# Altium PCB captivate_bswp.PcbDoc
Units mil, origin at the board's own origin, x right, y up, seen from the top; angles counter-clockwise.
Board outline 6000 x 3500 mil, 2 copper layers (Top Layer, Bottom Layer), stack 62 mil thick; 11 components, 28 nets, 57 pads, 27 vias.
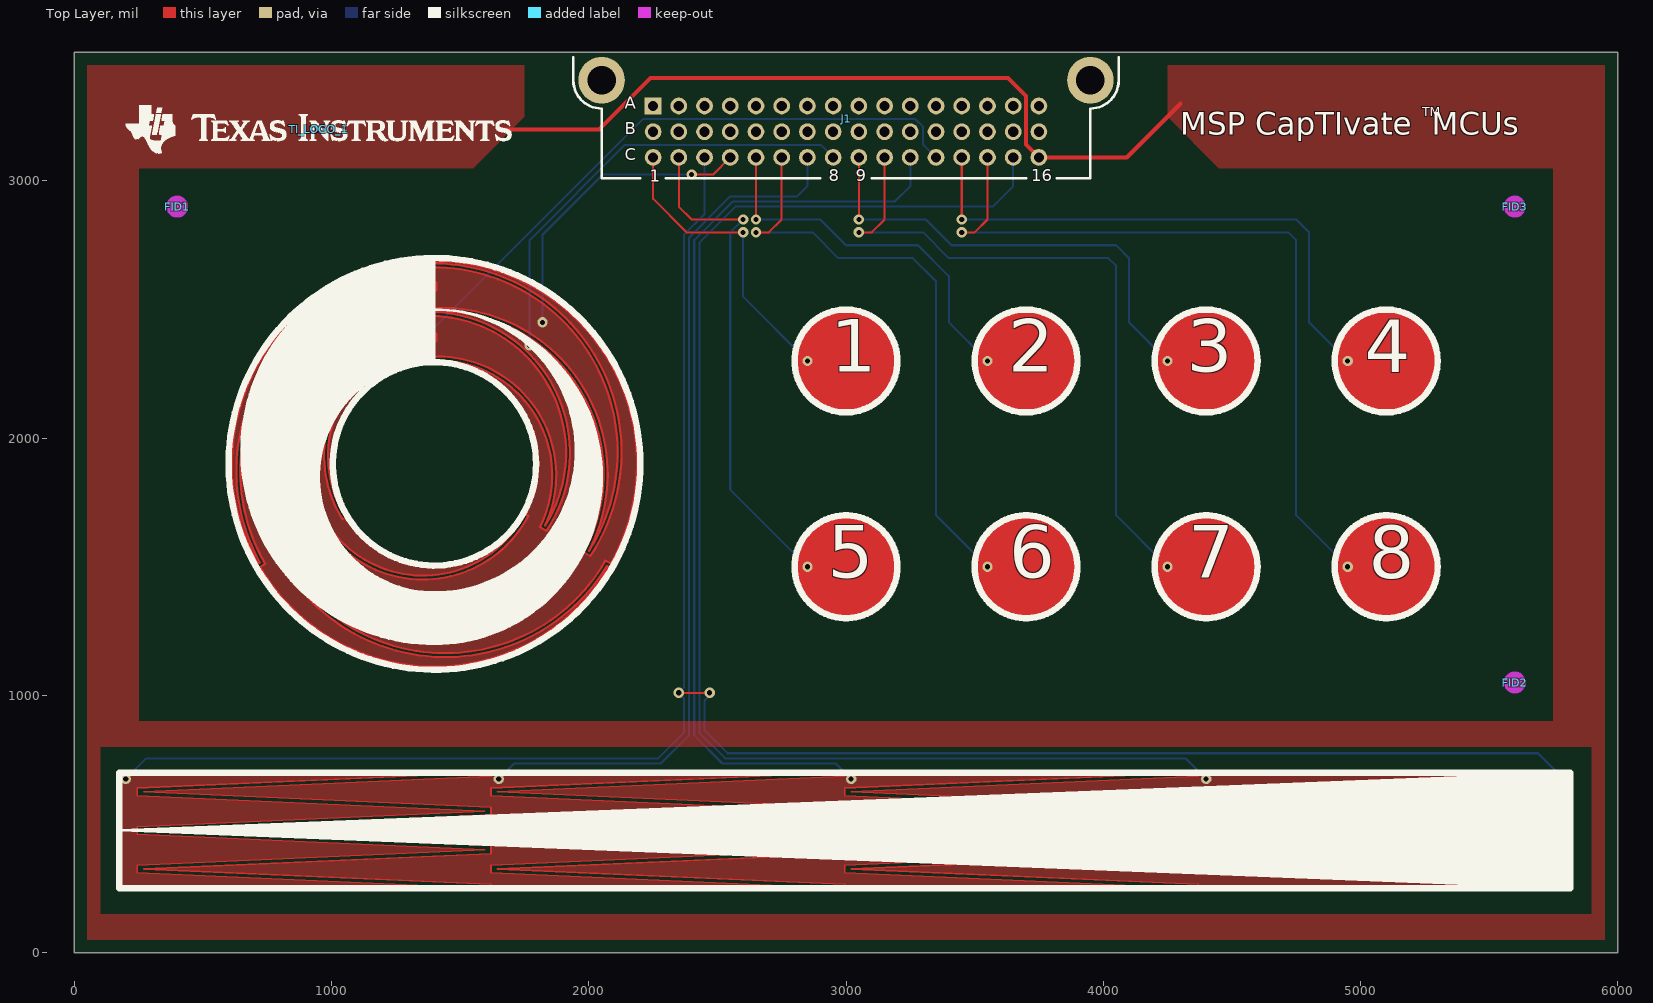
[diagram p0: Top Layer view]
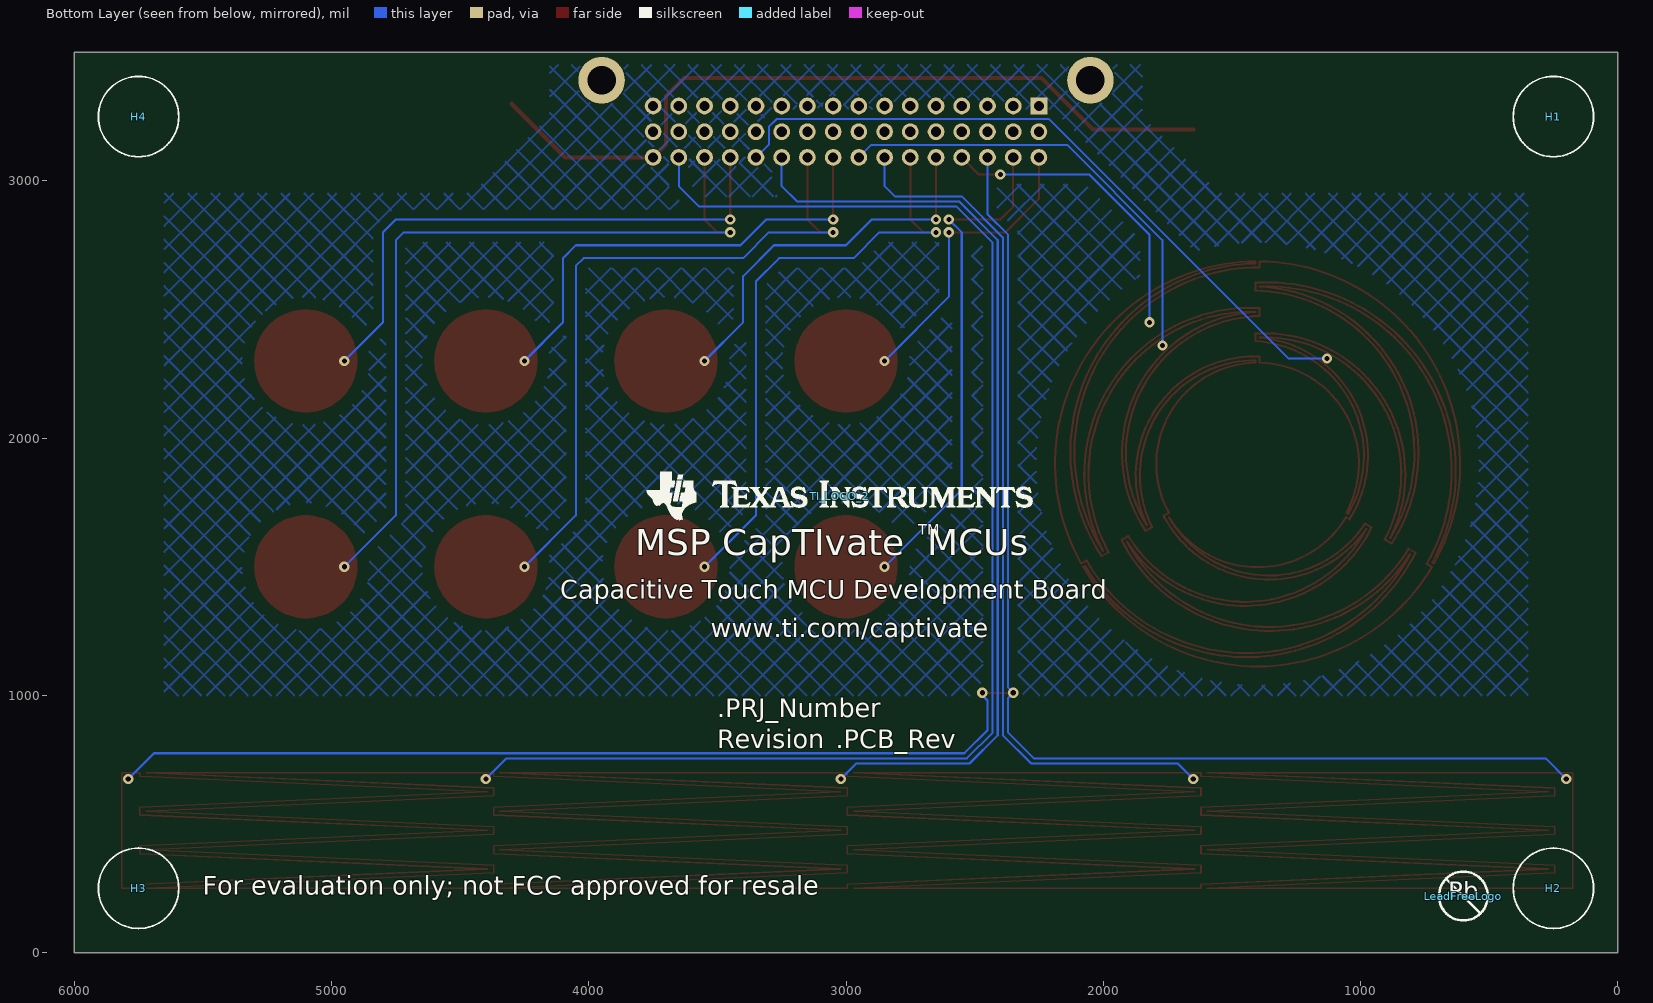
[diagram p1: Bottom Layer view, seen from below]

## Layer stack, top to bottom
Top Solder: solder mask 0.4, Solder Resist, Dk 3.5
Top Layer: signal copper 1.4
Dielectric1: core 59.2, FR-4, Dk 4.8
Bottom Layer: signal copper 1.4
Bottom Solder: solder mask 0.4, Solder Resist, Dk 3.5

## Board outline
0,0 0,3500 6000,3500 6000,0

## Design rules (kind name [scope] priority, off if disabled: settings)
AcuteAngle [All] p1: minimum=4.50000000000000E+0001 checktracksonly=FALSE
AssemblyTestPointUsage [All] p1: valid=2
Clearance Clearance_Poly_Bottom_To_Track [OnBottom And InPolygon vs IsTrack] p1: gap=32
Clearance Clearance_Poly_Connectors [(InNamedPolygon('Top Layer Pour')) OR (InNamedPolygon('Bottom Layer Pour')) vs (InComponent('J1')) OR (Incomponent('J2'))] p2: gap=40
Clearance Clearance_Poly_Components [(InNamedPolygon('Top Layer Pour')) OR (InNamedPolygon('Bottom Layer Pour'))] p3: gap=20
Clearance Clearance_General [All] p4: gap=6
Clearance Clearance_BoardEdge_MountingHoles [OnCopper and InComponentClass('Mounting Holes') vs IsKeepOut] p5: gap=40
Clearance Clearance_BoardEdge_Poly [OnCopper and InPoly vs IsKeepOut] p6: gap=7.87
Clearance Clearance_BoardEdge [OnCopper and Not InComponentClass('Logo') and not InComponentClass('FiducialMark') and not InRegion(1000,500,4000,800) and Not IsKeepout vs IsKeepOut] p7: gap=7.87
ComponentClearance ComponentClearance_Logo [InComponentClass('Logo')] p1: gap=7.87 collisioncheckmode=3 verticalgap=7.87 showdistances=TRUE
ComponentClearance ComponentClearance_ScrewToNut [(HasFootprint('NY PMS 440 0025 PH')) vs (HasFootprint('Keystone_1902C'))] p2: gap=5 collisioncheckmode=3 verticalgap=10 showdistances=FALSE
ComponentClearance ComponentClearance_MountingHoles [InComponentClass('Mounting Holes')] p3: gap=250 collisioncheckmode=3 verticalgap=100000 showdistances=FALSE
ComponentClearance ComponentClearance_SmallPassives [HasFootprint('0201*') or HasFootprint('0402*') or HasFootprint('0508') or HasFootprint('0603*') or HasFootprint('0612') or HasFootprint('0805*') or HasFootprint('0815*') or HasFootprint('0830*') or HasFootprint('1206*') or HasFootprint('1210*') or HasFootprint('1808*') or HasFootprint('1812*') or HasFootprint('1825*') or HasFootprint('2010*') or HasFootprint('2220*') or HasFootprint('2225*') or HasFootprint('2512*') or HasFootprint('2728*') or HasFootprint('3518*') vs HasFootprint('0201*') or HasFootprint('0402*') or HasFootprint('0508') or HasFootprint('0603*') or HasFootprint('0612') or HasFootprint('0805*') or HasFootprint('0815*') or HasFootprint('0830*') or HasFootprint('1206*') or HasFootprint('1210*') or HasFootprint('1808*') or HasFootprint('1812*') or HasFootprint('1825*') or HasFootprint('2010*') or HasFootprint('2220*') or HasFootprint('2225*') or HasFootprint('2512*') or HasFootprint('2728*') or HasFootprint('3518*')] p4: gap=20 collisioncheckmode=3 verticalgap=10 showdistances=FALSE
ComponentClearance ComponentClearance_THtoSMT [IsThruComponent vs IsSMTComponent] p5: gap=10 collisioncheckmode=3 verticalgap=100000 showdistances=TRUE
ComponentClearance ComponentClearance_THtoTH [IsThruComponent vs IsThruComponent] p6: gap=50 collisioncheckmode=3 verticalgap=100000 showdistances=FALSE
ComponentClearance [All] p7: gap=40 collisioncheckmode=3 verticalgap=10 showdistances=FALSE
DiffPairsRouting [All] p1: maxlimit=100 minlimit=10 mostfreqgap=10 toplayer_minwidth=15 toplayer_maxwidth=15 toplayer_prefwidth=15 bottomlayer_minwidth=15 bottomlayer_maxwidth=15 bottomlayer_prefwidth=15 maxuncoupledlength=1000
FabricationTestPointUsage TestPointUsage [All] p1: valid=2 allowmultiple=FALSE
FabricationTestpoint Testpoint [All] p1: side=3 testpointundercomponent=TRUE minsize=40 maxsize=100 preferedsize=60 minholesize=0 maxholesize=40 preferedholesize=32 testpointgrid=1 allowsidetop=TRUE allowsidebottom=TRUE usegrid=TRUE gridtolerance=0.01
FanoutControl Fanout_LCC [IsLCC] p1: bgadir=Out bgaviamode=Centered fanoutstyle=Auto fanoutdirection=Alternating viagrid=1 // Fanout_LCC (Default Rule)
FanoutControl Fanout_BGA [IsBGA] p2: bgadir=Out bgaviamode=Centered fanoutstyle=Auto fanoutdirection=Alternating viagrid=1 // Fanout_BGA (Default Rule)
FanoutControl Fanout_Default [All] p4: bgadir=Out bgaviamode=Centered fanoutstyle=Auto fanoutdirection=Alternating viagrid=1 // Fanout_Default (Default Rule)
FanoutControl Fanout_Small [(CompPinCount < 5)] p5: bgadir=Out bgaviamode=Centered fanoutstyle=Auto fanoutdirection=OutThenIn viagrid=1 // Fanout_Small (Default Rule)
HoleSize [All] p1: absolutevalues=TRUE maxlimit=251 minlimit=8 maxpercent=80.000 minpercent=20.000
MinimumAnnularRing [All] p1: minimumring=9
MinimumSolderMaskSliver MinimumSolderMaskSliver_Logo [InComponentClass('Logo') vs InComponentClass('Logo')] p1: minsoldermaskwidth=0.7
MinimumSolderMaskSliver [All] p2: minsoldermaskwidth=4
PlaneConnect [All] p1: planeconnectstyle=Relief reliefexpansion=10 reliefentries=4 reliefconductorwidth=10 reliefairgap=10
PolygonConnect [All] p1: connectstyle=Direct reliefconductorwidth=10 reliefentries=4 polygonreliefangle="45 Angle" airgapwidth=10
RoutingVias [All] p1: holewidth=16 width=34 viastyle="Through Hole" minholewidth=8 minwidth=26 maxholewidth=40 maxwidth=65
SilkToSilkClearance [All] p1: silktosilkclearance=5
SilkToSolderMaskClearance SilkscreenOverComponentPads [IsPad] p1: minsilkscreentomaskgap=5 clearancetoexposedcopper=TRUE
SolderMaskExpansion [All] p1: expansion=3
UnpouredPolygon [All] p1: allowunpoured=FALSE
Width [All] p1: maxlimit=100 minlimit=6 preferedwidth=10 checkconnectedcopper=TRUE
15 further rules are at their usual default settings.

## Classes and differential pairs
component class Logo: TI_LOGO_1 TI_LOGO_2
component class FiducialMark: FID1 FID2 FID3

## Components (designator, comment, footprint, x,y, rotation, side; value= is the part's Value field where it differs from the comment)
FID1 "Fiducial" Fiducial10-20 400,2900 r0 top
FID2 "Fiducial" Fiducial10-20 5600,1050 r0 top
FID3 "Fiducial" Fiducial10-20 5600,2900 r0 top
H1 "SJ61A1" Bumpon_SJ61A1 250,3250 r90 bottom
H2 "SJ61A1" Bumpon_SJ61A1 250,250 r90 bottom
H3 "SJ61A1" Bumpon_SJ61A1 5750,250 r90 bottom
H4 "SJ61A1" Bumpon_SJ61A1 5750,3250 r90 bottom
J1 "CAPTIVATE-CONN-PANEL" CAPTIVATE-CONN-48 3000,3500 r0 top
LeadFreeLogo "Pb-Free Symbol" Pb-Free_Overlay_Medium 600,220 r180 bottom
TI_LOGO_1 "Texas Instruments" TI_Horizontal_Overlay_Medium 950,3200 r0 top
TI_LOGO_2 "Texas Instruments" TI_Horizontal_Overlay_Medium 3025,1775 r180 bottom

## Footprints (in the part's own frame and the unit in brackets; to place one, negate y for a bottom-side part, rotate by r counter-clockwise, add the part's x,y. Pads: shape width x height; smd on the part's side, far side on the other; paste and mask are expansions set on the pad)
Bumpon_SJ61A1 [mil] "3M Cylindrical Bumpon black"
  round 1 on Mech4: 0(0,0)
  silkscreen extent -156,-156 156,156, body extent -156,-155 156,156, height 201
CAPTIVATE-CONN-48 [mm] "Connector, 3x16, 100mil, TH, RA"
  rect 1.65x1.65 hole 1: A1(-19.05,-5.3)
  round 1.65 hole 1: A2(-16.51,-5.3) A3(-13.97,-5.3) A4(-11.43,-5.3) A5(-8.89,-5.3) A6(-6.35,-5.3) A7(-3.81,-5.3) A8(-1.27,-5.3) A9(1.27,-5.3) A10(3.81,-5.3) A11(6.35,-5.3) A12(8.89,-5.3) A13(11.43,-5.3) A14(13.97,-5.3) A15(16.51,-5.3) A16(19.05,-5.3) B1(-19.05,-7.84) B2(-16.51,-7.84) B3(-13.97,-7.84) B4(-11.43,-7.84) B5(-8.89,-7.84) B6(-6.35,-7.84) B7(-3.81,-7.84) B8(-1.27,-7.84) B9(1.27,-7.84) B10(3.81,-7.84) B11(6.35,-7.84) B12(8.89,-7.84) B13(11.43,-7.84) B14(13.97,-7.84) B15(16.51,-7.84) B16(19.05,-7.84) C1(-19.05,-10.38) C2(-16.51,-10.38) C3(-13.97,-10.38) C4(-11.43,-10.38) C5(-8.89,-10.38) C6(-6.35,-10.38) C7(-3.81,-10.38) C8(-1.27,-10.38) C9(1.27,-10.38) C10(3.81,-10.38) C11(6.35,-10.38) C12(8.89,-10.38) C13(11.43,-10.38) C14(13.97,-10.38) C15(16.51,-10.38) C16(19.05,-10.38)
  round 4.6 hole 2.8: H1(-24.13,-2.76) H2(24.13,-2.76)
  silkscreen extent -26.92,-12.45 26.92,-0.51
Fiducial10-20 [mm]
  round 1 smd mask+0.5: 1(0,0)
  Top Layer keep-out circle w1.178: c0,0 r0.5
Pb-Free_Overlay_Medium [mil]
  silkscreen extent -95,-95 95,95
TI_Horizontal_Overlay_Medium [mil]
  silkscreen extent -750,-94 750,94

## Part data
FID1 FID2 FID3: "Fiducial mark.  There is nothing to buy or mount."
H1 H2 H3 H4: "Bumpon, Cylindrical, 0.312 X 0.200, Black"
J1: library part CAPTIVATE-CONN-MSP-EXP430FR2633-PANEL, "CapTIvate Panel-Side Connector, 3x16, 100mil, TH, RA, M, MSP-EXP430FR2633"
LeadFreeLogo: library part Pb-Free
TI_LOGO_1 TI_LOGO_2: library part TI_Logo, "Texas Instrument Corporate Signature"

## Via types
v1: diameter 40, hole 20, Top Layer to Bottom Layer, tented both sides, 27 vias

## Nets (pads, with @x,y where several pads share a name; then routed paths per layer and width w, separated by ;. In a path a pad name is that pad's centre, name@x,y a point inside that pad or via, vN(x,y) a via of type N, cw(c..) or ccw(c..) an arc to the next point about the centre after c; other vN are vias at no path point)
CAP0.0: J1.C1 | length 1168.7
  Top Layer w8: J1.C1 2250,2930 2380,2800 v1(2600,2800)
  Bottom Layer w8: v1(2600,2800) 2600,2550 v1(2850,2300)
CAP0.1: J1.C2 | length 1957
  Top Layer w8: J1.C2 2350,2900 2400,2850 v1(2600,2850)
  Bottom Layer w8: v1(2600,2850) 2550,2800 2550,1800 v1(2850,1500)
CAP0.2: J1.C3 | length 28498.6
  Top Layer w6: 175,250 175,700 1595,700 245,640 245,610 1595,550 245,490 245,460 1595,400 245,340 245,310 1595,250 175,250 ; 4395,325 5745,265 5745,250 5815,250 5815,700 5745,700 5745,685 4395,625 5745,565 5745,535 4395,475 5745,415 5745,385 4395,325
  Top Layer w8: v1(2350,1010) v1(2470,1010)
  Bottom Layer w8: v1(200,675) 280,755 2270,755 2370,855 2370,990 v1(2350,1010) 2370,1030 2370,2790 2450,2870 J1.C3 ; v1(2470,1010) 2470,1000 2450,980 2450,865 2540,775 5690,775 v1(5790,675)
CAP0.3: J1.C4 | length 13714
  Top Layer w7.87: 714.19,1513.14 cw(c1400,1900) 1392.13,2687.36 1392.13,2663.8 cw(c1393.9,1945.75) 2000.85,1562.06 ccw(c1427.26,1860.36) 1392.13,2505.93 1392.13,2475.05 cw(c1379.26,1942.96) 1830.13,1660.13 ccw(c1412.1,1855.9) 1392.13,2317.07 1392.13,2293.62 ccw(c1400,1900) 1055,1710.33 1048.11,1706.09 cw(c1432.66,1931.7) 1407.87,2376.87 1407.87,2406.59 ccw(c1373.66,1859.64) 884.93,1611.72 884.43,1611.34 cw(c1421.09,1942.8) 1407.87,2573.44 1407.87,2604.3 ccw(c1363.43,1871.84) 721.06,1517.11 714.19,1513.14
  Top Layer w8: v1(2400,3025) 2483.66,3025 J1.C4
  Bottom Layer w8: v1(1820,2450) 1820,2790 2055,3025 v1(2400,3025)
CAP1.0: J1.C5 | length 1474.6
  Top Layer w8: v1(2650,2850) J1.C5
  Bottom Layer w8: v1(2650,2850) 2900,2850 3000,2750 3280,2750 3400,2630 3400,2450 v1(3550,2300)
CAP1.1: J1.C6 | length 2333.6
  Top Layer w8: v1(2650,2800) 2700,2800 2750,2850 J1.C6
  Bottom Layer w8: v1(2650,2800) 2870,2800 2970,2700 3260,2700 3350,2610 3350,1700 v1(3550,1500)
CAP1.2: J1.C7 | length 22495.6
  Top Layer w6: 270,325 1620,265 1620,250 2970,250 1620,310 1620,340 2970,400 1620,460 1620,490 2970,550 1620,610 1620,640 2970,700 1620,700 1620,685 270,625 1620,565 1620,535 270,475 1620,415 1620,385 270,325
  Bottom Layer w8: v1(1650,675) 1710,735 2280,735 2390,845 2390,2780 2550,2940 2810,2940 2850,2980 J1.C7
CAP1.3: J1.C8 | length 14285.9
  Top Layer w5.91: 1979.28,1556.46 2006,1541.03
  Top Layer w7.87: 1979.28,1556.46 ccw(c1426.52,1860.33) 1407.87,2490.83 1407.87,2490.2 cw(c1379.26,1942.96) 1835.52,1639.46 1809.81,1654.46 ccw(c1412.1,1855.9) 1407.87,2301.7 1407.87,2293.62 cw(c1400,1900) 1744.67,1709.73 1765.13,1698.28 cw(c1355.76,1911.57) 977.2,1647.43 ccw(c1447.9,1895.84) 1902.45,1619 1928.69,1603.85 cw(c1352.38,1896.87) 807.53,1548.84 806.96,1548.52 ccw(c1442.67,1882.41) 2065.41,1524.92 2085.81,1513.14 ccw(c1400,1900) 1407.87,2687.36 1407.87,2679.42 cw(c1393.9,1945.75) 2006,1541.03
  Bottom Layer w8: v1(1770,2360) 1770,2770 2140,3140 2901.34,3140 J1.C8
CAP2.0: J1.C9 | length 1815.6
  Top Layer w8: v1(3050,2850) J1.C9
  Bottom Layer w8: v1(3050,2850) 3310,2850 3410,2750 4050,2750 4100,2700 4100,2450 v1(4250,2300)
CAP2.1: J1.C10 | length 2668.7
  Top Layer w8: v1(3050,2800) 3100,2800 3150,2850 J1.C10
  Bottom Layer w8: v1(3050,2800) 3300,2800 3400,2700 4020,2700 4050,2670 4050,1700 v1(4250,1500)
CAP2.2: J1.C11 | length 22739.7
  Top Layer w6: 1645,325 2995,385 2995,415 1645,475 2995,535 2995,565 1645,625 2995,685 2995,700 4345,700 2995,640 2995,610 4345,550 2995,490 2995,460 4345,400 2995,340 2995,310 4345,250 2995,250 2995,265 1645,325
  Bottom Layer w8: v1(3020,675) 2960,735 2520,735 2410,845 2410,2770 2560,2920 3190,2920 3250,2980 J1.C11
CAP2.3: J1.C12 | length 15226.2
  Top Layer w7.87: 1392.12,2588.68 ccw(c1421.1,1942.8) 879.18,1590.21 905.93,1605.66 cw(c1373.66,1859.64) 1392.43,2391.55 ccw(c1432.66,1931.7) 1042.75,1684.65 1055.97,1692.47 ccw(c1400,1900) 1743.88,1692.21 cw(c1355.76,1911.57) 982.43,1667.89 956.74,1652.83 ccw(c1447.9,1895.84) 1907.77,1597.83 cw(c1352.38,1896.86) 812.85,1570.1 786.12,1554.67 ccw(c1442.67,1882.41) 2071.06,1503.47 2077.94,1499.5 cw(c1400,1900) 722.06,1499.5 742.46,1511.28 cw(c1363.43,1871.84) 1392.13,2589.32 1392.13,2588.68
  Bottom Layer w8: v1(1130,2310) 1280,2310 2210,3240 3270,3240 3300,3210 3300,3141.34 J1.C12
CAP3.0: J1.C13 | length 2174.2
  Top Layer w8: v1(3450,2850) J1.C13
  Bottom Layer w8: v1(3450,2850) 4750,2850 4800,2800 4800,2450 v1(4950,2300)
CAP3.1: J1.C14 | length 3027.3
  Top Layer w8: v1(3450,2800) 3500,2800 3550,2850 J1.C14
  Bottom Layer w8: v1(3450,2800) 4720,2800 4750,2770 4750,1700 v1(4950,1500)
CAP3.2: J1.C15 | length 24468
  Top Layer w6: 3020,325 4370,385 4370,415 3020,475 4370,535 4370,565 3020,625 4370,685 4370,700 5720,700 4370,640 4370,610 5720,550 4370,490 4370,460 5720,400 4370,340 4370,310 5720,250 4370,250 4370,265 3020,325
  Bottom Layer w8: J1.C15 3650,2980 3570,2900 2570,2900 2430,2760 2430,855 2530,755 4320,755 v1(4400,675)
CAP3.3: J1.C16 | length 3057.6
  Top Layer w16: 1650,3200 2040,3200 2240,3400 3630,3400 3700,3330 3700,3141.34 J1.C16 4091.34,3091.34 4300,3300
GND: J1.A1 J1.A16
NetJ1_A2: J1.A2
NetJ1_A3: J1.A3
NetJ1_A4: J1.A4
NetJ1_A5: J1.A5
NetJ1_A11: J1.A11
NetJ1_A12: J1.A12
NetJ1_A13: J1.A13
NetJ1_A14: J1.A14
NetJ1_A15: J1.A15
NetJ1_H1: J1.H1
NetJ1_H2: J1.H2
pads on no net: FID1.1 FID2.1 FID3.1 H1.0 H2.0 H3.0 H4.0 J1.A6 J1.A7 J1.A8 J1.A9 J1.A10 J1.B1 J1.B2 J1.B3 J1.B4 J1.B5 J1.B6 J1.B7 J1.B8 J1.B9 J1.B10 J1.B11 J1.B12 J1.B13 J1.B14 J1.B15 J1.B16

## Polygon pours and split planes (outlines as drawn)
CAP3.3 on Top Layer "Top Layer-No Net 4" (solid, remove dead copper, pour order 21): 50,800 5950,800 5950,950 5750,950 5750,900 250,900 250,950 50,950 50,800
CAP3.3 on Top Layer "Top Layer-No Net 3" (solid, remove dead copper, pour order 16): 1750,3450 50,3450 50,50 5950,50 5950,3450 4250,3450 4250,3250 4450,3050 5750,3050 5750,950 5900,800 5900,300 5900,150 5250,150 100,150 100,800 250,950 250,1850 250,3050 800,3050 1550,3050 1750,3250 1750,3450
CAP1.3 on Top Layer "Top" (solid, remove dead copper, pour order 14): 803.47,1546.68 cw(c806.96,1548.52) 804.99,1551.94 805.55,1552.26 cw(c807.53,1548.84) 810.86,1550.97 ccw(c1352.38,1896.87) 1923.46,1602.31 1903.81,1613.65 cw(c1447.9,1895.84) 973.71,1645.59 cw(c977.2,1647.43) 977.2,1651.38 cw(c977.2,1647.43) 980.45,1649.69 ccw(c1355.76,1911.57) 1759.84,1696.72 1742.74,1706.28 cw(c1744.67,1709.73) 1741.22,1711.67 ccw(c1400,1900) 1789.75,1900 ccw(c1400,1900) 1407.82,2289.67 ccw(c1400.84,1900.94) 1407.79,2289.67 1407.82,2289.67 cw(c1407.87,2293.62) 1403.92,2293.62 1403.92,2301.7 cw(c1407.87,2301.7) 1407.84,2305.65 cw(c1412.1,1855.9) 1861.87,1855.9 cw(c1412.1,1855.9) 1815.01,1656.01 1834.28,1644.76 ccw(c1379.26,1942.96) 1923.29,1942.96 ccw(c1379.26,1942.96) 1407.7,2486.25 cw(c1407.87,2490.2) 1403.92,2490.2 1403.92,2490.83 cw(c1407.87,2490.83) 1407.76,2494.78 cw(c1426.52,1860.33) 2061.25,1860.33 cw(c1426.52,1860.33) 1984.59,1557.95 2004.75,1546.32 ccw(c1393.9,1945.75) 2123.75,1945.75 ccw(c1393.9,1945.75) 1407.83,2675.47 ccw(c1392.18,1945.8) 1407.8,2675.47 1407.83,2675.47 cw(c1407.87,2679.42) 1403.92,2679.42 1403.92,2687.36 cw(c1407.87,2687.36) 1407.91,2691.31 cw(c1400,1900) 2191.35,1900 cw(c1400,1900) 2089.26,1511.2 cw(c2085.81,1513.14) 2085.81,1509.19 cw(c2085.81,1513.14) 2083.84,1509.71 2066.86,1519.52 cw(c1442.67,1882.41)
CAP0.3 on Top Layer "Top" (solid, remove dead copper, pour order 12): 710.74,1511.2 ccw(c714.19,1513.14) 716.18,1509.72 723.03,1513.68 ccw(c721.06,1517.11) 725.02,1517.11 ccw(c721.06,1517.11) 724.52,1519.02 cw(c1363.43,1871.84) 1403.92,2600.57 1403.92,2577.3 ccw(c1421.09,1942.8) 881.07,1609.27 ccw(c884.43,1611.34) 886.78,1608.17 887.28,1608.54 ccw(c884.93,1611.72) 888.88,1611.72 ccw(c884.93,1611.72) 888.44,1613.53 cw(c1373.66,1859.64) 1403.92,2402.86 1403.92,2380.59 ccw(c1432.66,1931.7) 1044.7,1704.09 ccw(c1048.11,1706.09) 1050.21,1702.74 1057.05,1706.96 ccw(c1055,1710.33) 1058.95,1710.33 ccw(c1055,1710.33) 1058.45,1712.26 ccw(c1399.71,1898.89) 1058.46,1712.24 1058.45,1712.26 cw(c1400,1900) 1392.18,2289.67 ccw(c1392.13,2293.62) 1396.08,2293.62 1396.08,2313.27 cw(c1412.1,1855.9) 1869.75,1855.9 cw(c1412.1,1855.9) 1826.56,1661.83 ccw(c1830.13,1660.13) 1826.18,1660.13 ccw(c1830.13,1660.13) 1833.48,1658.03 ccw(c1379.26,1942.96) 1915.45,1942.96 ccw(c1379.26,1942.96) 1396.08,2478.89 1396.08,2502.18 cw(c1427.26,1860.36) 2069.83,1860.36 cw(c1427.26,1860.36) 1997.34,1563.88 ccw(c2000.85,1562.06) 2000.85,1558.1 ccw(c2000.85,1562.06) 2004.19,1559.94 ccw(c1393.9,1945.75) 2115.91,1945.75 ccw(c1393.9,1945.75) 1396.08,2667.75 1396.08,2687.36 ccw(c1392.13,2687.36) 1392.13,2691.31 ccw(c1392.13,2687.37) 1392.09,2691.31 ccw(c1400,1900)
CAP0.2 on Top Layer "Top Layer-CAPT_D.2" (solid, remove dead copper, pour order 15): 4395,475 5745,415 5745,385 4395,325 5745,265 5745,250 5815,250 5815,700 5745,700 5745,685 4395,625 5745,565 5745,535
CAP0.2 on Top Layer "Top Layer-CAPT_A.2" (solid, remove dead copper, pour order 17): 175,250 175,700 1595,700 245,640 245,610 1595,550 245,490 245,460 1595,400 245,340 245,310 1595,250
CAP1.2 on Top Layer "Top Layer-No Net" (solid, remove dead copper, pour order 18): 270,475 1620,415 1620,385 270,325 1620,265 1620,250 2970,250 1620,310 1620,340 2970,400 1620,460 1620,490 2970,550 1620,610 1620,640 2970,700 1620,700 1620,685 270,625 1620,565 1620,535
CAP2.2 on Top Layer "Top Layer-No Net 1" (solid, remove dead copper, pour order 19): 1645,325 2995,385 2995,415 1645,475 2995,535 2995,565 1645,625 2995,685 2995,700 4345,700 2995,640 2995,610 4345,550 2995,490 2995,460 4345,400 2995,340 2995,310 4345,250 2995,250 2995,265
CAP3.2 on Top Layer "Top Layer-No Net 2" (solid, remove dead copper, pour order 20): 3020,325 4370,385 4370,415 3020,475 4370,535 4370,565 3020,625 4370,685 4370,700 5720,700 4370,640 4370,610 5720,550 4370,490 4370,460 5720,400 4370,340 4370,310 5720,250 4370,250 4370,265
CAP2.3 on Top Layer "Top" (solid, remove dead copper, pour order 13): 718.66,1497.49 cw(c722.06,1499.5) 720.1,1502.93 737.07,1512.73 cw(c1363.43,1871.84) 1392.28,2593.27 cw(c1392.13,2589.32) 1396.08,2589.32 1396.08,2588.68 cw(c1392.13,2588.68) 1392.3,2584.73 ccw(c1421.1,1942.8) 880.46,1595.51 900.63,1607.16 cw(c1373.66,1859.64) 1392.57,2395.5 cw(c1392.43,2391.55) 1396.39,2391.55 cw(c1392.43,2391.55) 1392.78,2387.61 ccw(c1432.66,1931.7) 1044.05,1690.01 1053.95,1695.86 cw(c1055.96,1692.47) 1053.96,1695.87 cw(c1055.97,1692.47) 1059.37,1694.48 cw(c1400.01,1900.31) 1059.35,1694.51 1059.37,1694.48 ccw(c1400,1900) 1740.5,1694.26 ccw(c1743.88,1692.21) 1740.44,1694.16 1740.5,1694.26 cw(c1743.88,1692.21) 1747.83,1692.21 cw(c1743.88,1692.21) 1747.26,1690.17 1747.32,1690.27 cw(c1355.76,1911.57) 981.19,1662.58 961.93,1651.29 ccw(c1447.9,1895.84) 1904.44,1599.96 cw(c1907.77,1597.83) 1907.77,1601.78 cw(c1907.77,1597.83) 1911.72,1597.83 cw(c1907.77,1597.83) 1911.25,1595.96 cw(c1352.38,1896.86) 811.48,1564.75 791.33,1553.11 ccw(c1442.67,1882.41) 2067.68,1505.51 cw(c2071.06,1503.47) 2071.06,1507.42 cw(c2071.06,1503.47) 2073.04,1506.89 2079.91,1502.92 cw(c2077.94,1499.5) 2081.89,1499.5 cw(c2077.94,1499.5) 2081.34,1497.49 cw(c1400,1900)
GND on Bottom Layer "Bottom Layer-No Net" (hatched 45Degree grid 64 track 8, remove dead copper, pour order 22): 350,1000 5650,1000 5650,2950 4450,2950 4150,3250 4150,3450 1850,3450 1850,3300 1850,3250 1550,2950 350,2950 350,1000

## Other copper
Top Layer:
  region net CAP0.0: 3000,2100 cw(c3000,2300) 2800,2300 cw(c3000,2300) 3000,2500 cw(c3000,2300) 3200,2300 cw(c3000,2300)
  region net CAP1.0: 3700,2100 cw(c3700,2300) 3500,2300 cw(c3700,2300) 3700,2500 cw(c3700,2300) 3900,2300 cw(c3700,2300)
  region net CAP2.0: 4200,2300 ccw(c4400,2300) 4400,2100 ccw(c4400,2300) 4600,2300 ccw(c4400,2300) 4400,2500 ccw(c4400,2300)
  region net CAP3.0: 4900,2300 ccw(c5100,2300) 5100,2100 ccw(c5100,2300) 5300,2300 ccw(c5100,2300) 5100,2500 ccw(c5100,2300)
  region net CAP0.1: 3000,1300 cw(c3000,1500) 2800,1500 cw(c3000,1500) 3000,1700 cw(c3000,1500) 3200,1500 cw(c3000,1500)
  region net CAP1.1: 3500,1500 ccw(c3700,1500) 3700,1300 ccw(c3700,1500) 3900,1500 ccw(c3700,1500) 3700,1700 ccw(c3700,1500)
  region net CAP2.1: 4200,1500 ccw(c4400,1500) 4400,1300 ccw(c4400,1500) 4600,1500 ccw(c4400,1500) 4400,1700 ccw(c4400,1500)
  region net CAP3.1: 4900,1500 ccw(c5100,1500) 5100,1300 ccw(c5100,1500) 5300,1500 ccw(c5100,1500) 5100,1700 ccw(c5100,1500)
Bottom Layer:
  pour cut-out: 1400,1037.5 cw(c1400,1900) 537.5,1900 cw(c1400,1900) 1400,2762.5 cw(c1400,1900) 2262.5,1900 cw(c1400,1900)
  pour cut-out: 3000,2050 cw(c3000,2300) 2750,2300 cw(c3000,2300) 3000,2550 cw(c3000,2300) 3250,2300 cw(c3000,2300)
  pour cut-out: 3700,2050 cw(c3700,2300) 3450,2300 cw(c3700,2300) 3700,2550 cw(c3700,2300) 3950,2300 cw(c3700,2300)
  pour cut-out: 4150,2300 ccw(c4400,2300) 4400,2050 ccw(c4400,2300) 4650,2300 ccw(c4400,2300) 4400,2550 ccw(c4400,2300)
  pour cut-out: 4850,2300 ccw(c5100,2300) 5100,2050 ccw(c5100,2300) 5350,2300 ccw(c5100,2300) 5100,2550 ccw(c5100,2300)
  pour cut-out: 3000,1250 cw(c3000,1500) 2750,1500 cw(c3000,1500) 3000,1750 cw(c3000,1500) 3250,1500 cw(c3000,1500)
  pour cut-out: 3450,1500 ccw(c3700,1500) 3700,1250 ccw(c3700,1500) 3950,1500 ccw(c3700,1500) 3700,1750 ccw(c3700,1500)
  pour cut-out: 4150,1500 ccw(c4400,1500) 4400,1250 ccw(c4400,1500) 4650,1500 ccw(c4400,1500) 4400,1750 ccw(c4400,1500)
  pour cut-out: 4850,1500 ccw(c5100,1500) 5100,1250 ccw(c5100,1500) 5350,1500 ccw(c5100,1500) 5100,1750 ccw(c5100,1500)

## Silkscreen, mask and mechanical layers (free items; w line width, h text height)
Top Overlay:
  circle w25: c1400,1900 r800.39
  circle w25: c5100,1500 r200
  circle w25: c4400,1500 r200
  circle w25: c3700,1500 r200
  circle w25: c3000,1500 r200
  circle w25: c5100,2300 r200
  circle w25: c4400,2300 r200
  circle w25: c3700,2300 r200
  circle w25: c1400,1900 r395.28
  circle w25: c3000,2300 r200
  region: 175,475 5815,700 5815,250
  region: 1400,1200 cw(c1400,1950) 1400,2700 1400,2300 ccw(c1400,1850) 1400,1400 ccw(c1400,1950) 1400,2500 cw(c1400,1850)
  lines w10: 5815,250 175,475 5815,700 ; 1400,1200 cw(c1400,1950) 1400,2700 1400,2300 ccw(c1400,1850) 1400,1400 ccw(c1400,1950) 1400,2500 cw(c1400,1850) 1400,1200
  lines w25: 175,250 175,700 5815,700 5815,250 175,250
  text "TM" at 5240,3240 h60
  text "MSP CapTIvate  MCUs" at 4300,3150 h150
  text "1" at 2940,2190 h350
  text "2" at 3630,2190 h350
  text "3" at 4325,2190 h350
  text "4" at 5017.5,2187.71 h350
  text "5" at 2930,1390 h350
  text "6" at 3635,1390 h350
  text "7" at 4330,1390 h350
  text "8" at 5032.5,1387.71 h350
Bottom Overlay:
  text "TM" at 2720,1610 h70
  text "MSP CapTIvate  MCUs" at 3820,1510 h175
  text "Capacitive Touch MCU Development Board" at 4110,1350 h125
  text "www.ti.com/captivate" at 3525,1200 h125
  text ".PRJ_Number" at 3500,890 h125
  text ".PCB_Rev" at 3040,770 h125
  text "Revision" at 3500,770 h125
  text "For evaluation only; not FCC approved for resale" at 5500,200 h125
M1 Board Outline:
  the board outline again, w10
M2 Board Dimensions:
  circle w10: c3000,2300 r250
  circle w10: c3700,2300 r250
  circle w10: c4400,2300 r250
  circle w10: c5100,2300 r250
  circle w10: c3000,1500 r250
  circle w10: c3700,1500 r250
  circle w10: c4400,1500 r250
  circle w10: c5100,1500 r250
  rectangle: -385.5,-1870.5 -10.5,-1745.5
  rectangle: -510.5,-1745.5 -385.5,-1620.5
  lines w7: -510.5,-1745.5 489.5,-1745.5 ; -385.5,-1870.5 -385.5,-1620.5 ; -260.5,-1870.5 -260.5,-1620.5 ; -10.5,-1870.5 -10.5,-1620.5 ; 239.5,-1870.5 239.5,-1620.5 ; -510.5,-1870.5 -510.5,-1620.5 489.5,-1620.5 489.5,-1870.5 -510.5,-1870.5
  lines w10: -510.5,-1935.5 -510.5,-1915.5 ; -450.5,-1945.5 -510.5,-1925.5 ; -450.5,-1905.5 -510.5,-1925.5 ; -286.42,-1925.5 -510.5,-1925.5 ; 265.42,-1925.5 489.5,-1925.5 ; 429.5,-1945.5 489.5,-1925.5 ; 429.5,-1905.5 489.5,-1925.5 ; 489.5,-1935.5 489.5,-1915.5
  text "1000 (mil)" at -276.42,-1961.49 h60
M3 3D STEP Top:
  text ".Layer_Name" at 67,-2318.49 h60
M4 3D STEP Bottom:
  text ".Layer_Name" at 67,-2318.49 h60
M5 Assembly Top:
  lines w7: 9529,-1749.5 10654,-1749.5 ; 9529,-1627 10651.5,-1627 ; 9844,-1869.5 9844,-1507 ; 10229,-1869.5 9529,-1869.5 ; 10229,-1507 9529,-1507 ; 9529,-1869.5 9529,-1507 ; 9529,-1869.5 10654,-1869.5 10654,-1507 9529,-1507
  lines w10: -802,-2390.17 5798,-2390.17 ; -802,-2186.83 5800,-2186.83 ; -802,-1983.5 -802,-2593.5 3203,-2593.5 5800,-2593.5 5800,-1983.5 -801.5,-1983.5 -801.5,-2593.5 774,-2593.5 ; 1663,-2593.5 1663,-1983.5 ; 2930,-2186.83 2930,-1983.5 ; 3770,-2186.83 3770,-1983.5 ; 4392,-2600 4392,-2397.17
  text "TABLE 1" at 9916.5,-1472 h40
  text "Variant" at 9554,-1582 h40
  text "Label text" at 9989,-1582 h40
  text "001" at 9621.5,-1702 h40
  text "ChangeMe!" at 9899,-1704.5 h40
  text "COMPONENTS MARKED 'DNP' SHOULD NOT BE POPULATED." at 643.5,-1778.5 h60
  text "002" at 9621.5,-1827 h40
  text "ChangeMe!" at 9894,-1829.5 h40
  text "ASSEMBLY VARIANT:" at 643,-1894 h60
  text ".VariantName" at 1679,-1894 h60
  text "PCB VIEWED FROM TOP SIDE" at -738.5,-2115.67 h60
  text "BOARD #:" at 1738,-2115.67 h60
  text ".PRJ_Number" at 2283.5,-2115.67 h60
  text "REV:" at 3128,-2115.67 h60
  text ".PCB_Rev" at 3419.5,-2115.67 h60
  text "SVN REV:" at 3966,-2115.67 h60
  text ".VersionControl_RevNumber" at 4472,-2115.67 h60
  text "IGNORE ->" at -738.5,-2318.49 h60
  text "PLOT NAME =" at -738.5,-2524.34 h60
  text ".plot_File_Name" at 67,-2524.34 h60
  text "GENERATED    :" at 1740,-2524.34 h60
  text ".Print_Date" at 2609.5,-2524.34 h60
  text ".Print_Time" at 3338.5,-2524.34 h60
  text "TEXAS INSTRUMENTS" at 4603,-2524.34 h60
M6 Assembly Bottom:
  lines w10: -802.5,-2187.33 5799.5,-2187.33 ; -800.5,-2390.67 5799.5,-2390.67 ; 605.5,-2600.5 605.5,-2397.67 ; 1227.5,-2187.33 1227.5,-1984 ; 2067.5,-2187.33 2067.5,-1984 ; 3334.5,-2594 3334.5,-1984 ; 4223.5,-2594 5799,-2594 5799,-1984 -802.5,-1984 -802.5,-2594 1794.5,-2594 5799.5,-2594 5799.5,-1984
  text "COMPONENTS MARKED 'DNP' SHOULD NOT BE POPULATED." at 5592,-1778 h60
  text ".VariantName" at 4548,-1894 h60
  text "ASSEMBLY VARIANT:" at 5587,-1894 h60
  text ".PCB_Rev" at 1860,-2110 h60
  text ".PRJ_Number" at 2714,-2116.17 h60
  text "BOARD #:" at 3259.5,-2116.17 h60
  text "PCB VIEWED FROM BOTTOM SIDE" at 5736,-2116.17 h60
  text "IGNORE ->" at 2037.85,-2318.49 h60
  text "TEXAS INSTRUMENTS" at 394.5,-2524.84 h60
  text ".plot_File_Name" at 4930.5,-2524.84 h60
  text "PLOT NAME =" at 5736,-2524.84 h60
  text ".Print_Time" at 1690,-2530 h60
  text ".Print_Date" at 2419,-2530 h60
  text "GENERATED    :" at 3288.5,-2530 h60
M9 Title Sheet:
  drawing of 57 lines, arcs and shapes, not listed
  text "1" at 229.84,6576.5 h70
  text "2" at 2725.5,6576.5 h70
  text "3" at 5214.84,6576.5 h70
  text "4" at 7721.51,6576.5 h70
  text "5" at 10220.5,6576.5 h70
  text "6" at 12725.5,6576.5 h70
  text "A" at -926.5,5433.5 h70
  text "A" at 13873.5,5433.5 h70
  text "B" at -926.5,3053.5 h70
  text "B" at 13873.5,3053.5 h70
  text "C" at -926.5,678.5 h70
  text "C" at 13873.5,678.5 h70
  text "PROJECT TITLE:" at 10833.5,-1182.5 h45
  text "TICAPEVM_BSWPDEMO" at 10883.5,-1315.83 h70
  text "DESIGNED FOR:" at 10833.5,-1483.5 h45
  text ".PRJ_Customer" at 10883.5,-1623.5 h70
  text "D" at -926.5,-1691.5 h70
  text "D" at 13873.5,-1691.5 h70
  text "FILE NAME:" at 10833.5,-1783.5 h45
  text ".PCB_File_Name_No_Path" at 10883.5,-1903.5 h70
  text "Texas Instruments (TI) and/or its licensors do not warrant the accuracy or completeness of this specification" at 5864,-2065.34 h45
  text "ENGINEER:" at 10833.5,-2073.5 h45
  text "LAYOUT BY:" at 12338.5,-2073.5 h45
  text "or any information contained therein. TI and/or its licensors do not warrant that this design will meet" at 5819.01,-2178 h45
  text "W. Schnoor" at 10883.5,-2228.49 h70
  text "W. Schnoor" at 12389,-2228.49 h70
  text "the specifications, will be suitable for your application or fit for any particular purpose, or will operate in" at 5819.01,-2290.67 h45
  text "ALTIUM DESIGNER VERSION:" at 12338.5,-2383.5 h45
  text "an implementation. TI and/or its licensors do not warrant that the design is production worthy. You should" at 5819.01,-2403.33 h45
  text "completely validate and test your design implementation to confirm the system functionality for your application." at 5864,-2516 h45
  text ".print_Scale" at 10883.5,-2516.83 h70
  text ".Application_BuildNumber" at 12389,-2516.83 h70
  text "1" at 229.84,-2723.5 h70
  text "2" at 2725.5,-2723.5 h70
  text "3" at 5214.84,-2723.5 h70
  text "4" at 7721.51,-2723.5 h70
  text "5" at 10220.5,-2723.5 h70
  text "6" at 12725.5,-2723.5 h70
M10 Fab Notes:
  drawing of 207 lines, arcs and shapes, not listed
  text "DESIGN INFORMATION" at 11871.02,5350 h60
  text "(REFER ALSO ARRAY/PANEL PROFILING INFORMATION)" at 11509.46,5188.29 h60
  text "BOARD SIZE" at 10823.46,5184 h60
  text "3450MIL" at 11285.78,5056.18 h60
  text "X" at 11791.46,5056.18 h60
  text "4950MIL" at 12022.78,5056.18 h60
  text "Number of Layers :" at 11226.46,4859 h60
  text "2" at 12321.27,4849 h60
  text "MIN. TRACK WIDTH:" at 11226.46,4720 h60
  text "8" at 12322.7,4720 h60
  text "MIL" at 12477.46,4720 h60
  text "MIN. CLEARANCE:" at 11226.46,4588 h60
  text "8" at 12322.7,4588 h60
  text "MIL" at 12477.46,4588 h60
  text "MIN. VIA PAD SIZE:" at 11226.46,4456 h60
  text "24" at 12292.71,4456 h60
  text "MIL" at 12477.46,4456 h60
  text "0.05mm (2MIL)" at 11921.46,4314.29 h60
  text "MINIMUM ANNULAR RING" at 10897.23,4310 h60
  text "EXTERNAL" at 12629.46,4310 h60
  text "PER" at 11097.23,4192 h60
  text "IPC-D-275 CLASS 2 LEVEL C" at 11317.23,4192 h60
  text "MIL, HOLES" at 12805.46,4079.71 h60
  text "+/-" at 12413,4079 h60
  text "+/-" at 13267,4079 h60
  text "REGISTRATION TOLERANCES:" at 10897.23,4074 h60
  text "METAL" at 12097,4074 h60
  text "5" at 12673.2,4074 h60
  text "3" at 13506.2,4074 h60
  text "MIL" at 13622.46,4074 h60
  text "MATERIAL:" at 10822.46,3864.54 h60
  text "FR-4 High Tg" at 11808.9,3724.21 h60
  text "FR-4" at 11283.46,3715.64 h60
  text "X" at 11655.46,3715.64 h60
  text "OTHER" at 12731.46,3715.64 h60
  text "62 MIL (1.6mm) +/-10%" at 11563.56,3552.92 h60
  text "THICKNESS:" at 10897.23,3548.64 h60
  text "X" at 11435.4,3548.64 h60
  text "OTHER" at 12848.46,3548.64 h60
  text "TOLERANCE:" at 10897.23,3390.64 h60
  text "X" at 11736.53,3390.64 h60
  text "ANSI IPC-6012 TYPE 3 CLASS 2" at 11923.48,3390.64 h60
  text "OTHER +/-" at 11923.46,3234.64 h60
  text "BOW & TWIST:" at 10897.23,3077.64 h60
  text "X" at 11736.53,3077.64 h60
  text "ANSI IPC-6012 TYPE 3 CLASS 2" at 11923.48,3077.64 h60
  text "OTHER +/-" at 11923.46,2919.13 h60
  text "COPPER THICKNESS (FINISHED):" at 10822.46,2783.64 h60
  text "1.4MIL (1oz)" at 11702.46,2630.92 h60
  text "2MIL (1.4oz)" at 12469.46,2630.92 h60
  text "2.8MIL (2oz)" at 13196.46,2630.92 h60
  text "OUTER:" at 11179.46,2626.64 h60
  text "X" at 11574,2626 h60
  text "1.4MIL (1oz)" at 11702.46,2473.92 h60
  text "2.8MIL (2oz)" at 12469.46,2473.92 h60
  text "N/A" at 13196,2474.29 h60
  text "INNER SIGNAL:" at 10890.38,2469.64 h60
  text "X" at 11575.42,2469.64 h60
  text "DRILLING:" at 10822.46,2330.64 h60
  text "REFERENCE:" at 10897.23,2213.64 h60
  text "X" at 11545.46,2213.64 h60
  text "AS SHOWN" at 11732.46,2213.64 h60
  text "X" at 12446.46,2213.64 h60
  text "NC_DRILL FILES" at 12583.46,2213.64 h60
  text "PTH MIN COPPER THICKNESS:" at 10897.23,2055.64 h60
  text "X" at 12247.46,2055.64 h60
  text "1MIL" at 12384.46,2055.64 h60
  text "OTHER" at 12881.46,2055.64 h60
  text "BOARD FINISH:" at 10822.46,1896.64 h60
  text "SILKSCREEN:" at 10977.68,1778.64 h60
  text "X" at 11926.46,1778.64 h60
  text "TOP" at 12052.46,1778.64 h60
  text "X" at 12436.46,1778.64 h60
  text "BOTTOM" at 12563.46,1778.64 h60
  text "SILKSCREEN COLOR:" at 10977.68,1611.64 h60
  text "X" at 11925.42,1611.64 h60
  text "WHITE" at 12052.46,1611.64 h60
  text "OTHER" at 12563.46,1611.64 h60
  text "SOLDER RESIST COLOR:" at 10977.68,1441.64 h60
  text "GREEN" at 11672.46,1282.44 h60
  text "BLUE" at 12263.46,1282.44 h60
  text "OTHER" at 12801.46,1282.44 h60
  text "X" at 12650,1280 h60
  text "BLACK" at 13160,1270 h200
  text "IMMERSION GOLD (ENIG)" at 11883.46,1093.92 h60
  text "SURFACE FINISH:" at 10822.46,1089.64 h60
  text "X" at 11696.51,1089.64 h60
  text "IMM. TIN/SILVER OR EQUIV" at 11152,932.64 h60
  text "OTHER" at 12583.46,932.64 h60
  text "ARRAY/PANEL:" at 10822.46,753.64 h60
  text "CUT AND TRIM PER MECH LAYER 1" at 11883.46,749.35 h60
  text "N.C. ROUTE" at 11883.46,597.64 h60
  text "X" at 12562.46,597.64 h60
  text "V. SCORE" at 12749.46,597.64 h60
  text "CERTIFICATION:" at 10822.46,460.64 h60
  text "MATERIALS AND WORKMANSHIP FOR ALL PCBS" at 11547.46,460.64 h60
  text "TO MEET OR EXCEED THE REQUIREMENTS OF:" at 11547.46,362.64 h60
  text "X" at 11173.96,226.13 h60
  text "ANSI IPC-A-600F CLASS ->" at 11312.96,226.13 h60
  text "X" at 12952.02,226.13 h60
  text "2" at 13070.96,226.14 h60
  text "1" at 12755.96,224.64 h60
  text "3" at 13424.96,224.64 h60
  text "X" at 11176.02,66.64 h60
  text "UL 94V-0" at 11312.96,66.64 h60
  text "X" at 11988.02,66.64 h60
  text "RoHS" at 12124.96,66.64 h60
  text "OTHER" at 12769.36,66.64 h60
  text "PER ORDER" at 13166.42,66.64 h60
  text "ADDITIONAL REQUIREMENTS:" at 10822.46,-74.36 h60
  text "MICROSECTION:" at 10897.23,-189.36 h60
  text "YES" at 11802.96,-189.36 h60
  text "REQUIRED" at 12664.46,-345.51 h60
  text "BARE BOARD ELEC. TEST:" at 10897.23,-348.36 h60
  text "NONE" at 12202.96,-348.36 h60
  text "X" at 12537.46,-348.36 h60
  text "PER ORDER" at 13256.46,-348.36 h60
  text "MANUFACTURER'S ID/LOGO:" at 10897.23,-505.36 h60
  text "RAIL" at 12362.96,-509.65 h60
  text "X" at 12737.46,-509.65 h60
  text "METAL" at 12854.77,-509.65 h60
  text "SILK" at 13366.46,-509.65 h60
  text ".Layer_Name" at 67,-2318.49 h60
M11 Gerber Information:
  lines w10: -802,-2390.17 5798,-2390.17 ; -802,-2186.83 5800,-2186.83 ; -802,-1983.5 -802,-2593.5 3203,-2593.5 5800,-2593.5 5800,-1983.5 -801.5,-1983.5 -801.5,-2593.5 774,-2593.5 ; 1663,-2593.5 1663,-1983.5 ; 2930,-2186.83 2930,-1983.5 ; 3770,-2186.83 3770,-1983.5 ; 4392,-2600 4392,-2397.17
  text "ALL ARTWORK VIEWED FROM TOP SIDE" at -738.5,-2115.67 h60
  text "BOARD #:" at 1738,-2115.67 h60
  text ".PRJ_Number" at 2283.5,-2115.67 h60
  text "REV:" at 3128,-2115.67 h60
  text ".PCB_Rev" at 3419.5,-2115.67 h60
  text "SVN REV:" at 3966,-2115.67 h60
  text ".VersionControl_RevNumber" at 4472,-2115.67 h60
  text "LAYER NAME =" at -738.5,-2318.49 h60
  text "PLOT NAME =" at -738.5,-2524.34 h60
  text ".plot_File_Name" at 67,-2524.34 h60
  text "GENERATED    :" at 1740,-2524.34 h60
  text ".Print_Date" at 2609.5,-2524.34 h60
  text ".Print_Time" at 3338.5,-2524.34 h60
  text "TEXAS INSTRUMENTS" at 4603,-2524.34 h60
M12 Stackup:
  lines w6: 10850,6000 13400,6000 ; 10850,6104.4 13400,6104.4 ; 10790,5515 ccw(c10824,5515) 10824,5481 13426,5481 ccw(c13426,5515) 13460,5515 13460,6221 ccw(c13426,6221) 13426,6255 10824,6255 ccw(c10824,6221) 10790,6221 10790,5515
  text "The Stackup Legend below this is static." at 11095.5,6414.5 h60
  text "If you change the stackup, update the Legend." at 11105.5,6324.5 h60
  text "Layer Stack Up Detail for: Ref_Design.PcbDoc" at 10850,6137.1 h57
  text "Layer" at 10850,6065.4 h24
  text "Gerber" at 11745.81,6065.4 h24
  text "Copper" at 12309.33,6065.4 h24
  text "Dielectric" at 12912.04,6065.4 h24
  text "Name" at 10850,6017.4 h24
  text "Document" at 11745.81,6017.4 h24
  text "Thickness" at 12309.33,6017.4 h24
  text "Material" at 12912.04,6017.4 h24
  text "Top Solder Mask" at 10850,5924.44 h34
  text "(.GTS)" at 11745.81,5924.44 h34
  text "Solder Resist" at 12912.04,5924.44 h34
  text "Top Layer" at 10850,5827.69 h34
  text "(.GTL)" at 11745.81,5827.69 h34
  text "1.4mil" at 12309.33,5827.69 h34
  text "FR-4" at 12912.04,5779.31 h34
  text "Bottom Layer" at 10850,5730.94 h34
  text "(.GBL)" at 11745.81,5730.94 h34
  text "1.4mil" at 12309.33,5730.94 h34
  text "Bottom Solder Mask" at 10850,5634.19 h34
  text "(.GBS)" at 11745.81,5634.19 h34
  text "Solder Resist" at 12912.04,5634.19 h34
Mechanical 18:
  circle w10: c1400,1900 r380
  circle w10: c1400,1900 r805
  circle w10: c3700,1500 r200
  circle w10: c5100,2300 r200
  circle w10: c5100,1500 r200
  circle w10: c3000,1500 r200
  circle w10: c4400,1500 r200
  circle w10: c4400,2300 r200
  circle w10: c3700,2300 r200
  circle w10: c3000,2300 r200
  lines w1: 0,0 6000,0 6000,3500 4110,3500 ccw(c4110,3480) 4090,3480 4090,3270 cw(c4070,3270) 4070,3250 3840,3250 ccw(c3840,3210) 3800,3210 3800,3060 cw(c3780,3060) 3780,3040 2200,3040 cw(c2200,3060) 2180,3060 2180,3210 ccw(c2140,3210) 2140,3250 1930,3250 cw(c1930,3270) 1910,3270 1910,3480 ccw(c1890,3480) 1890,3500 0,3500 0,0
  lines w9.84: 175,250 5815,250 5815,700 175,700 175,250

## Dimensions
6000,0 to 6000,3500 on M2 Board Dimensions
0,3500 to 6000,3500 on M2 Board Dimensions

## Text inside footprints (layer, text, board x,y; h text height)
J1: Top Overlay "9" at 3038,2983 h80; Top Overlay "16" at 3720,2983 h80; Top Overlay "8" at 2933,2983 h80; Top Overlay "C" at 2140,3065 h80; Top Overlay "B" at 2140,3165 h80; Top Overlay "A" at 2140,3265 h80; Top Overlay "1" at 2238,2982 h80; M2 Board Dimensions "PCB Edge" at 2920,3460 h23.62
LeadFreeLogo: Bottom Overlay "Pb" at 659.25,182.18 h120